# Altium PCB Level Shifter.PcbDoc
Units mil, origin at the board's own origin, x right, y up, seen from the top; angles counter-clockwise.
Board outline 600 x 500 mil, 2 copper layers (Top Layer, Bottom Layer), stack 61.756 mil thick; 14 components, 11 nets, 40 pads, 1 vias.
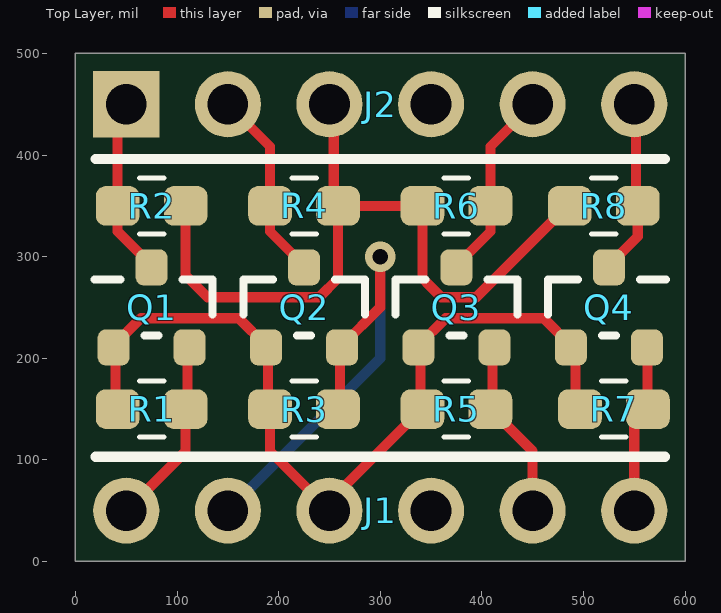
[diagram p0: Top Layer view]
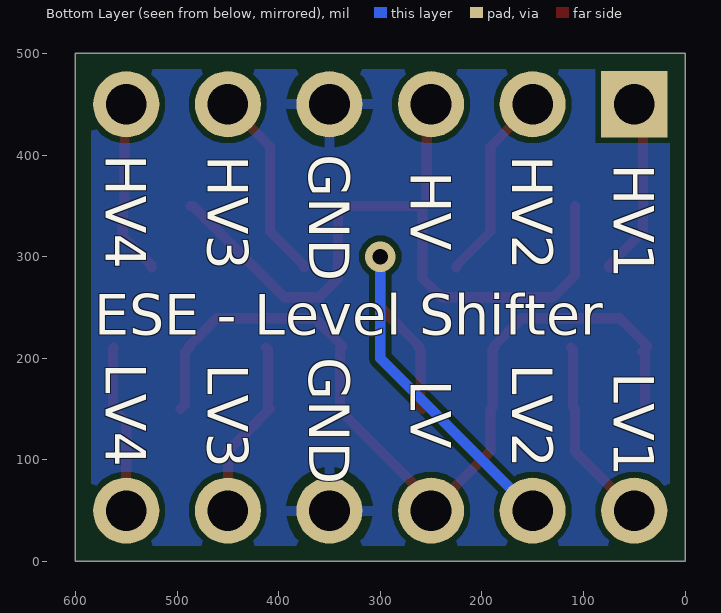
[diagram p1: Bottom Layer view, seen from below]
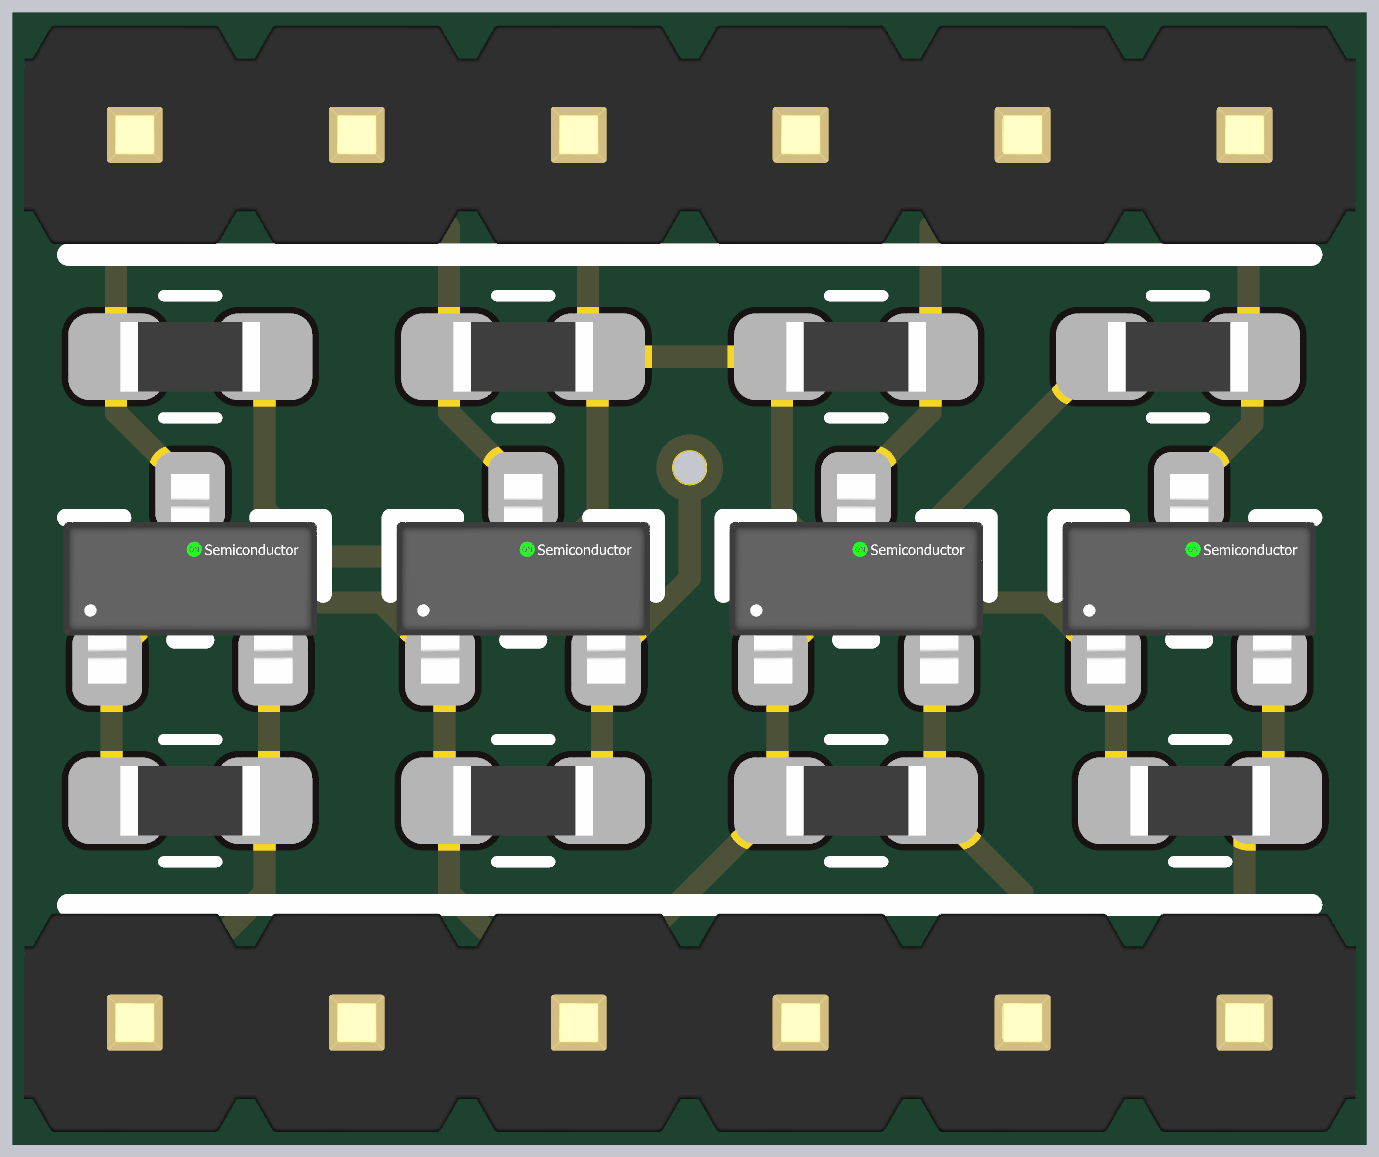
[diagram p2: 3D render of the assembled board from above, using the file's embedded part models]

## Layer stack, top to bottom
Top Solder: solder mask 1, PSR-4000BN, Dk 4.5
Top Layer: signal copper 1.378
Dielectric 1: core 59, Kingboard KB6167F, Dk 4.5
Bottom Layer: signal copper 1.378
Bottom Solder: solder mask 1, PSR-4000BN, Dk 4.5

## Board outline
0,0 600,0 600,500 0,500

## Design rules (kind name [scope] priority, off if disabled: settings)
AcuteAngle [All] p1: minimum=6.00000000000000E+0001 checktracksonly=FALSE
BoardOutlineClearance [All] p1: gap=15 ignorepadtopadclearanceinfootprint=FALSE
Clearance [All] p1: gap=6 ignorepadtopadclearanceinfootprint=FALSE except(0: Arc-Hole Track-Hole SMDPad-Hole THPad-Hole Via-Hole Fill-Hole Poly-Hole Region-Hole Text-Hole)
ComponentClearance [All] p1: gap=1 collisioncheckmode=3 verticalgap=1 showdistances=FALSE
DiffPairsRouting [All] p1: maxlimit=393.7 minlimit=6 mostfreqgap=8 toplayer_minwidth=6 toplayer_maxwidth=15 toplayer_prefwidth=8 bottomlayer_minwidth=6 bottomlayer_maxwidth=15 bottomlayer_prefwidth=8 maxuncoupledlength=500
HoleSize [All] p1: absolutevalues=TRUE maxlimit=265 minlimit=13 maxpercent=80.000 minpercent=20.000
HoleToHoleClearance [All] p1: gap=10 allowstackedmicrovias=FALSE
MinimumAnnularRing [All] p1: minimumring=7
MinimumSolderMaskSliver [All] p1: minsoldermaskwidth=0
PlaneClearance [All] p1: clearance=10
PlaneConnect [All] p1: planeconnectstyle=Direct reliefexpansion=16 reliefentries=4 reliefconductorwidth=6 reliefairgap=6
PolygonConnect [All] p1: thpad.connectstyle=Relief thpad.reliefconductorwidth=10 thpad.reliefentries=4 thpad.polygonreliefangle="90 Angle" thpad.airgapwidth=10 smdpad.connectstyle=Relief smdpad.reliefconductorwidth=8 smdpad.reliefentries=4 smdpad.polygonreliefangle="90 Angle" smdpad.airgapwidth=6 via.connectstyle=Direct via.reliefconductorwidth=8 via.reliefentries=4 via.polygonreliefangle="90 Angle" via.airgapwidth=6
RoutingCorners [All] p1: cornerstyle=45-Degree minsetback=49.21 maxsetback=49.21
RoutingVias [All] p1: holewidth=15 width=30 viastyle="Through Hole" minholewidth=13 minwidth=27 maxholewidth=100 maxwidth=114
SMDNeckDown [All] p1: percent=75.000
SilkToSilkClearance SilkTextToSilk [IsText AND OnSilkscreen] p1: silktosilkclearance=5
SilkToSilkClearance [All] p2: silktosilkclearance=0
SilkToSolderMaskClearance [IsPad] p1: minsilkscreentomaskgap=6 clearancetoexposedcopper=TRUE
SolderMaskExpansion "Tent Vias" [IsVia] p1: expansion=4 istentingtop=TRUE
SolderMaskExpansion [All] p2: expansion=2.95 istentingtop=FALSE
Width [All] p1: maxlimit=400 minlimit=6 preferedwidth=8
20 further rules are at their usual default settings.

## Components (designator, comment, footprint, x,y, rotation, side; value= is the part's Value field where it differs from the comment)
J1 "MHDR 1X6" "MHDR 1X6"#1 300,50 r0 top
J2 "MHDR 1X6" "MHDR 1X6"#2 300,450 r0 top
Q1 "BSS138" SOT-23-3_ONSEMI 75,250 r90 top
Q2 "BSS138" SOT-23-3_ONSEMI 225,250 r90 top
Q3 "BSS138" SOT-23-3_ONSEMI 375,250 r90 top
Q4 "BSS138" SOT-23-3_ONSEMI 525,250 r90 top
R1 "RES 0603 10K 1%" 0603_RES 75,150 r180 top value=10k
R2 "RES 0603 10K 1%" 0603_RES 75,350 r0 top value=10k
R3 "RES 0603 10K 1%" 0603_RES 225,150 r180 top value=10k
R4 "RES 0603 10K 1%" 0603_RES 225,350 r0 top value=10k
R5 "RES 0603 10K 1%" 0603_RES 375,150 r180 top value=10k
R6 "RES 0603 10K 1%" 0603_RES 375,350 r180 top value=10k
R7 "RES 0603 10K 1%" 0603_RES 530,150 r180 top value=10k
R8 "RES 0603 10K 1%" 0603_RES 520,350 r180 top value=10k

## Footprints (in the part's own frame and the unit in brackets; to place one, negate y for a bottom-side part, rotate by r counter-clockwise, add the part's x,y. Pads: shape width x height; smd on the part's side, far side on the other; paste and mask are expansions set on the pad)
0603_RES [mil]
  rrect50% 43x39 smd: 1(-33.46,0) 2(33.46,0)
  silkscreen extent -12,-28 12,28, body extent -31,-16 32,16, height 24
"MHDR 1X6"#1 [mil]
  round 65 hole 40: 1(-250,0) 2(-150,0) 3(-50,0) 4(50,0) 5(150,0) 6(250,0)
  silkscreen extent -280,53 280,53, body extent -300,-49 300,49, height 335
"MHDR 1X6"#2 [mil]
  rect 65x65 hole 40: 1(-250,0)
  round 65 hole 40: 2(-150,0) 3(-50,0) 4(50,0) 5(150,0) 6(250,0)
  silkscreen extent -280,-54 280,-54, body extent -300,-49 300,49, height 335
SOT-23-3_ONSEMI [mm] "FP-318-08-MFG"
  rrect50% 0.9x0.8 smd: 1(-1,0.95) 2(-1,-0.95) 3(1,0)
  silkscreen extent -0.7,-1.52 0.7,1.42, body extent -1.55,-1.62 1.55,1.62, height 0.25

## Part data
J1 J2: library part CMP-00091-3, "Header, 6-Pin, 0.1in Pitch, Male", Contact Resistance=20mR, Dielectric Withstanding Voltage (AC)=500V, Insulation Color=Black, Insulation Resistance=1GR, JLCPCB Part #=C178289, Max Operating Temperature=125°C, Min Operating Temperature=-40°C, Rated Current (Signal)=3A, Body Breadth=0.1inch, Body Depth=0.1inch, Body Length=0.6inch, Body/Shell Style=PLUG, Connector Type="BOARD CONNECTOR", Contact Finish - Mating=GOLD, Contact Finish - Termination="Gold (Au) - with Nickel (Ni) barrier", Contact Gender=Male, Contact Material="Copper Alloy", Contact Pattern=RECTANGULAR, Contact Style="SQ PIN-SKT", Insulation Material=Polybutylene, JESD-609 Code=e4, Mating Contact Pitch=0.1inch, Mounting Option 1=LOCKING, Mounting Style=STRAIGHT, Mounting Technology=Board, Number Of Connectors=1, Number of Contacts=6, Number of Rows Loaded=1, PCB Contact Pattern=RECTANGULAR, Pitch="0.1 inch", Reach SVHC Compliant=Yes, Reference Standard=UL, Reliability=COMMERCIAL, RoHS Compliant=Yes, Terminal Length=0.118inch, Terminal Pitch=2.54mm, Termination=Solder
Q1 Q2 Q3 Q4: library part CMP-00090-4, "Small Signal Field-Effect Transistor, 0.22A I(D), 50V, 1-Element, N-Channel, Silicon, Metal-oxide Semiconductor FET", JLCPCB Part #=C52895, I_D (Max Continuous)=220mA, V_DSS (Max)=50V, V_GSS (Max)=20V
R1 R2 R3 R4 R5 R6 R7 R8: library part CMP-005-002156-2, "Resistor Surface Mount, 10K Ohms, 0603 Footprint, 1% Tolerance 0.1W", JLCPCB Part #=C25804, Manufacturer=Various, PCB Package=0603, Power Rating=0.1W, Tolerance=1%, Description in Visual="Res SMT 10K 0603  1%  0.1W", Manufacturer P/N="RES 0603 10K 1%", Mount=SMT

## Via types
v1: diameter 30, hole 15, Top Layer to Bottom Layer, tented both sides, 1 vias

## Nets (pads, with @x,y where several pads share a name; then routed paths per layer and width w, separated by ;. In a path a pad name is that pad's centre, name@x,y a point inside that pad or via, vN(x,y) a via of type N, cw(c..) or ccw(c..) an arc to the next point about the centre after c; other vN are vias at no path point)
GND: J1.4 J2.4
HV1: J2.1 Q1.3 R2.1 | length 178
  Top Layer w10: J2.1 41.54,441.54 R2.1 41.54,324.8 75,291.34 Q1.3
HV2: J2.2 Q2.3 R4.1 | length 191.7
  Top Layer w10: J2.2 191.54,408.46 R4.1 191.54,324.8 225,291.34 Q2.3
HV3: J2.5 Q3.3 R6.1 | length 191.7
  Top Layer w10: Q3.3 375,291.34 408.46,324.8 R6.1 408.46,408.46 J2.5
HV4: J2.6 Q4.3 R8.1 | length 173.9
  Top Layer w10: Q4.3 525,291.34 553.46,319.8 R8.1 551.73,351.73 551.73,448.27 J2.6
LV1: J1.1 Q1.2 R1.1 | length 186.5
  Top Layer w10: J1.1 108.46,108.46 R1.1 110.43,151.97 110.43,208.66 Q1.2
LV2: J1.2 Q2.2 R3.1 | length 479.3
  Top Layer w10: R3.1 260.43,151.97 260.43,208.66 Q2.2 262.4,212.5 300,250.1 v1(300,300)
  Bottom Layer w10: J1.2 300,200 v1(300,300)
LV3: J1.5 Q3.2 R5.1 | length 179.9
  Top Layer w10: Q3.2 410.43,208.66 410.43,151.97 R5.1 409.25,150 421.08,138.17 421.08,137.39 450,108.46 J1.5
LV4: J1.6 Q4.2 R7.1 | length 166.3
  Top Layer w10: J1.6 550,137.32 R7.1@562.68,150 ; Q4.2 562.93,210.1 562.93,150.53 R7.1
VCC_H: J2.3 R2.2 R4.2 R6.2 R8.2 | length 754.7
  Top Layer w10: R2.2 108.46,281.54 130,260 240.04,260 258.46,278.43 R4.2 ; J2.3 254.23,445.77 254.23,354.23 R4.2 ; 348.25,271.71 359.96,260 394.54,260 484.54,350 R8.2 ; 348.25,271.75 341.54,278.46 R6.2 R4.2
VCC_L: J1.3 Q1.1 Q2.1 Q3.1 Q4.1 R1.2 R3.2 R5.2 R7.2 | length 868
  Top Layer w10: R1.2 39.57,151.97 39.57,203.66 42.07,206.16 Q1.1 37.6,212.6 64.35,239.35 160.85,239.35 187.6,212.6 Q2.1 189.57,208.66 189.57,151.97 R3.2 191.54,108.46 J1.3 250,59.25 340.75,150 R5.2 339.57,151.97 339.57,208.66 Q3.1 337.6,212.6 364.35,239.35 460.85,239.35 487.6,212.6 Q4.1 492.07,206.16 492.07,154.47 R7.2

## Polygon pours and split planes (outlines as drawn)
GND on Bottom Layer "GND_L02_P000" (solid, remove dead copper, pour order 0): 0,0 600,0 600,500 0,500

## Silkscreen, mask and mechanical layers (free items; w line width, h text height)
Bottom Overlay:
  text "GND" at 370,401.04 h40 r90
  text "HV4" at 570,400.94 h40 r90
  text "HV2" at 170,399.99 h40 r90
  text "HV3" at 470,399.99 h40 r90
  text "HV1" at 70,391.42 h40 r90
  text "HV" at 270,384.09 h40 r90
  text "ESE - Level Shifter" at 581.47,223.15 h40
  text "GND" at 370,201.04 h40 r90
  text "LV4" at 570,195.7 h40 r90
  text "LV2" at 170,194.75 h40 r90
  text "LV3" at 470,194.75 h40 r90
  text "LV1" at 70,186.18 h40 r90
  text "LV" at 270,178.85 h40 r90
Board Outline:
  the board outline again, w10

## Text inside footprints (layer, text, board x,y; h text height)
R1: Librarian Notes "SS 102512, ADDED SILKSCREEN." at 132,124 h1 r180
R2: Librarian Notes "SS 102512, ADDED SILKSCREEN." at 18,376 h1
R3: Librarian Notes "SS 102512, ADDED SILKSCREEN." at 282,124 h1 r180
R4: Librarian Notes "SS 102512, ADDED SILKSCREEN." at 168,376 h1
R5: Librarian Notes "SS 102512, ADDED SILKSCREEN." at 432,124 h1 r180
R6: Librarian Notes "SS 102512, ADDED SILKSCREEN." at 432,324 h1 r180
R7: Librarian Notes "SS 102512, ADDED SILKSCREEN." at 587,124 h1 r180
R8: Librarian Notes "SS 102512, ADDED SILKSCREEN." at 577,324 h1 r180